# Altium PCB CAR_Amplifier.PcbDoc
Units mil, origin at the board's own origin, x right, y up, seen from the top; angles counter-clockwise.
Board outline 3145 x 2850 mil, 2 copper layers (Top Layer, Bottom Layer); 23 components, 24 nets, 69 pads, 3 vias.
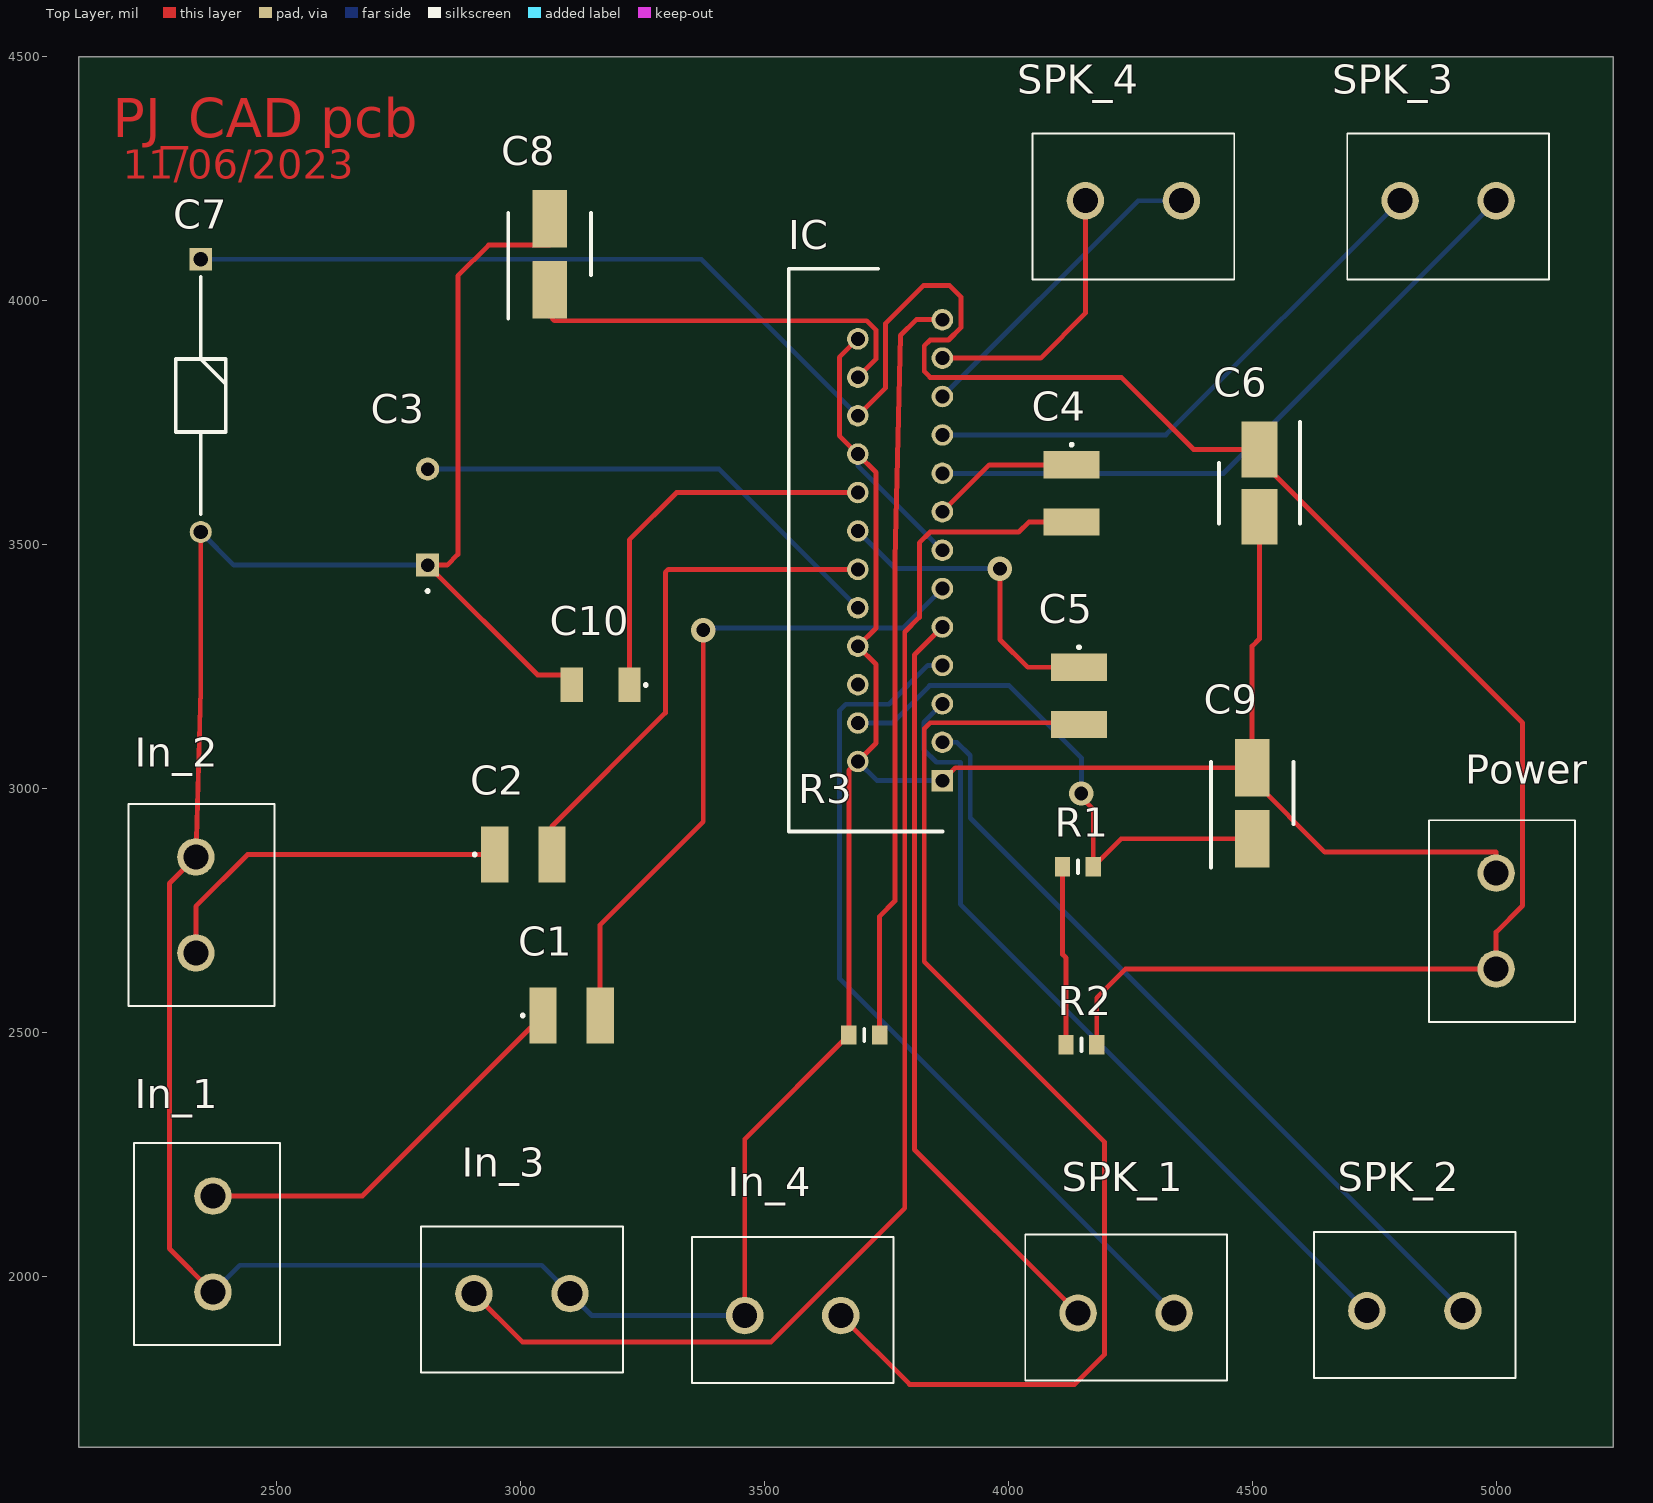
[diagram p0: Top Layer view]
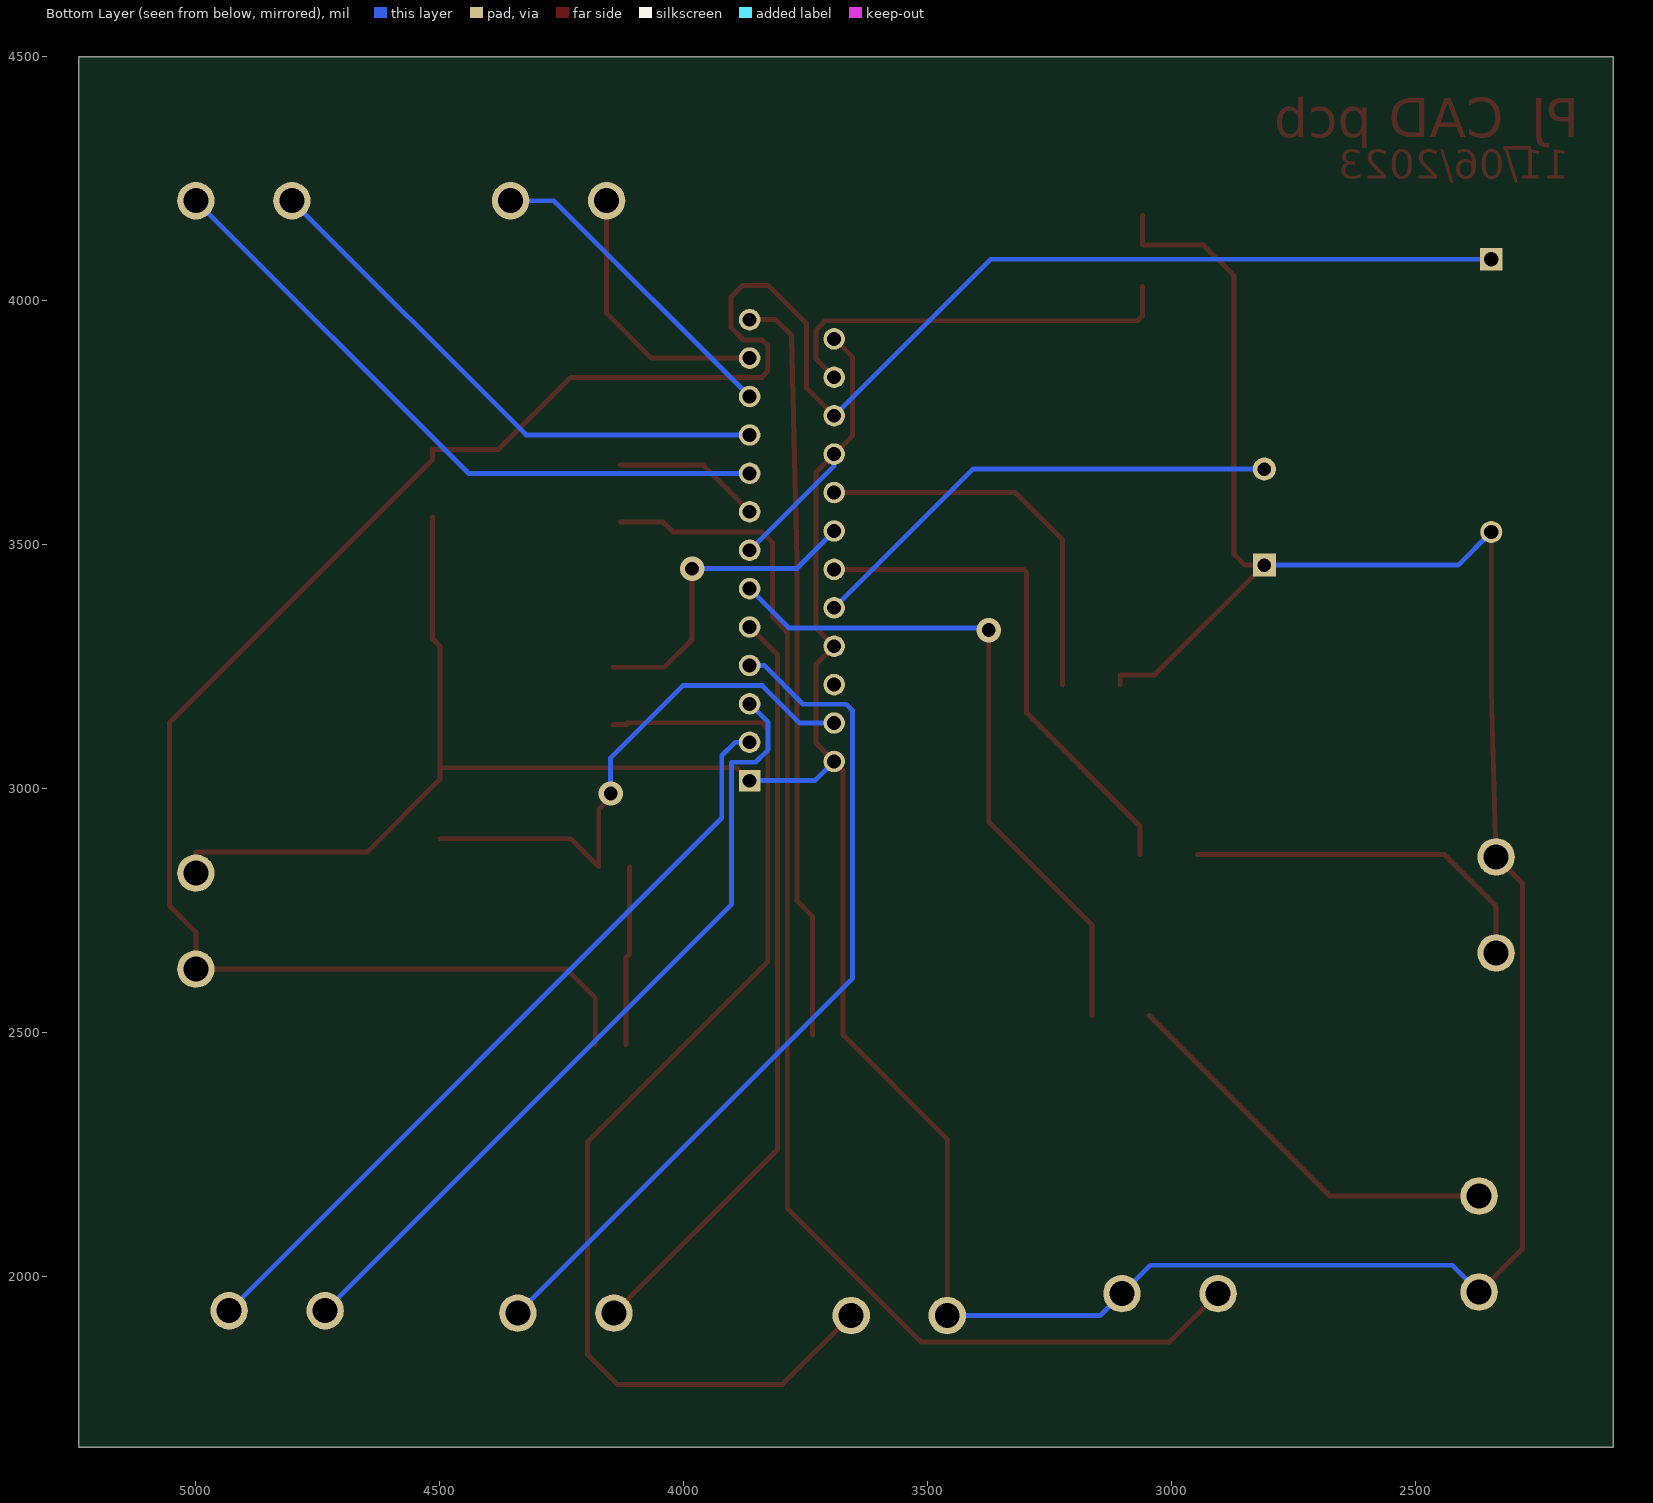
[diagram p1: Bottom Layer view, seen from below]
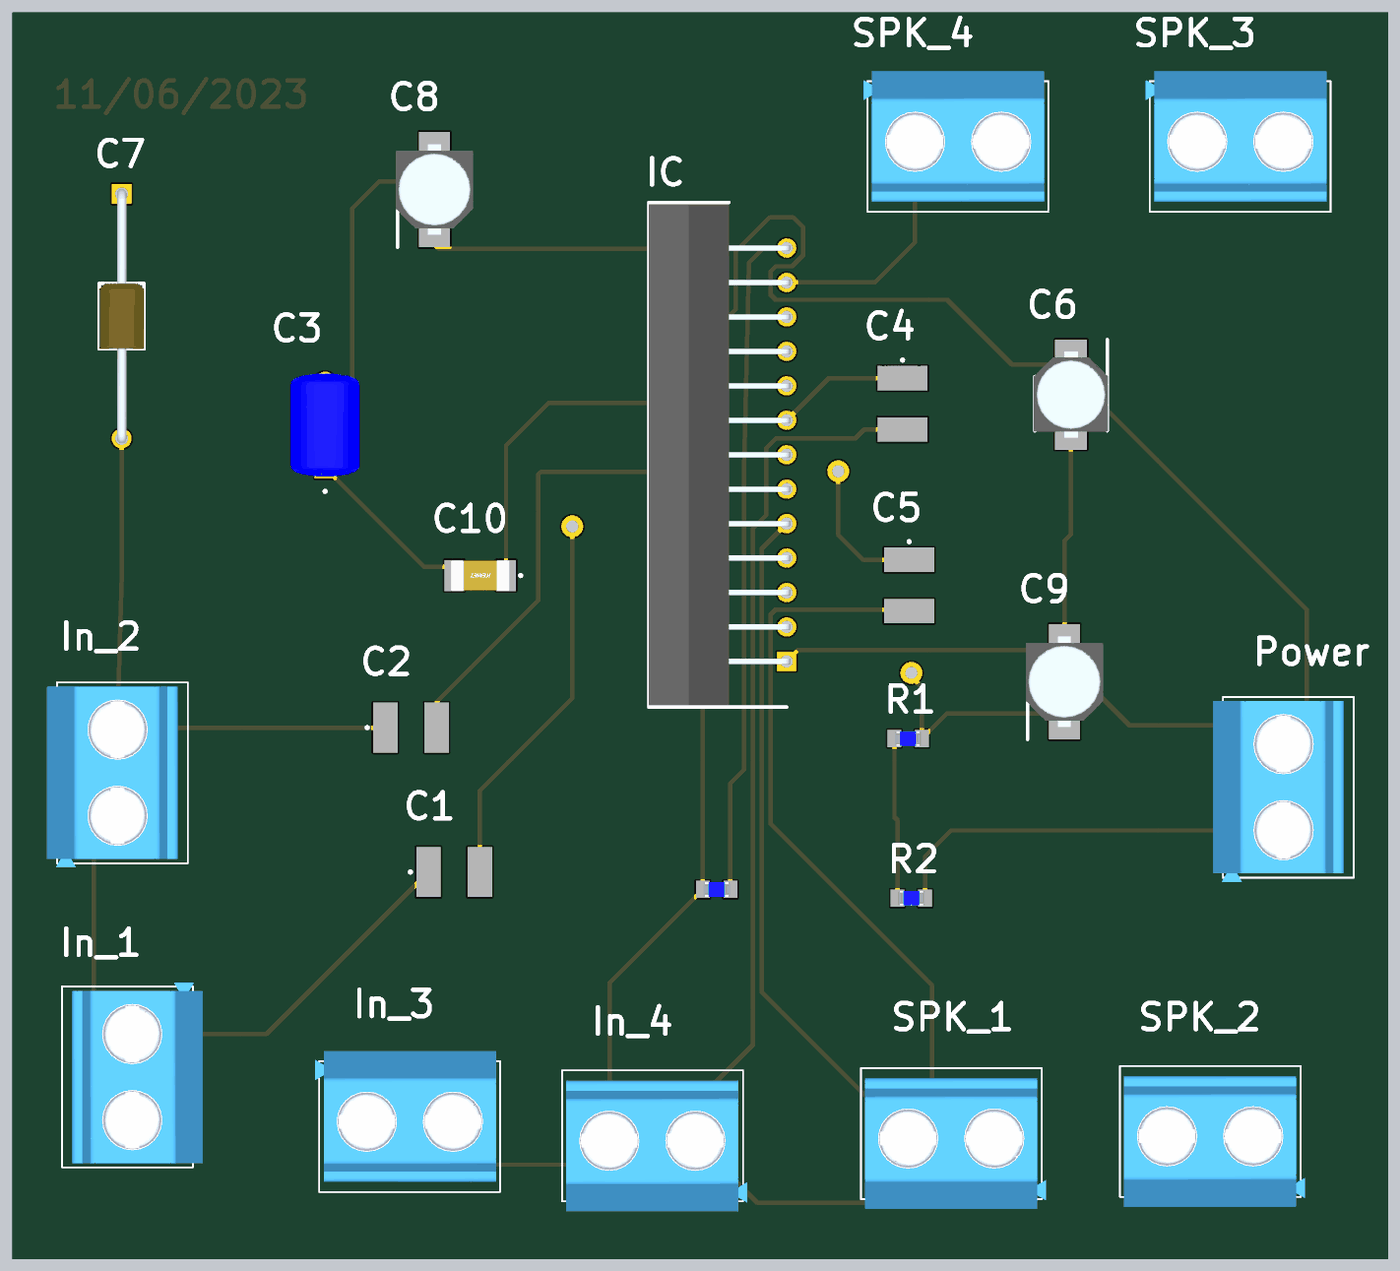
[diagram p2: 3D render of the assembled board from above, using the file's embedded part models]

## Layer stack, top to bottom
Top Solder: solder mask 0.4, Solder Resist, Dk 3.5
Top Layer: signal copper 1.4
Dielectric 1: dielectric 12.6, FR-4, Dk 4.8
Bottom Layer: signal copper 1.4
Bottom Solder: solder mask 0.4, Solder Resist, Dk 3.5

## Board outline
2095,1650 5240,1650 5240,4500 2095,4500

## Design rules (kind name [scope] priority, off if disabled: settings)
Clearance [All] p1: gap=10 ignorepadtopadclearanceinfootprint=FALSE except(0: Arc-Hole Track-Hole SMDPad-Hole THPad-Hole Via-Hole Fill-Hole Poly-Hole Region-Hole Text-Hole)
PolygonConnect [All] p1: connectstyle=Relief reliefconductorwidth=10 reliefentries=4 polygonreliefangle="90 Angle" airgapwidth=10
RoomDefinition CAR_Amplifier [InComponentClass('CAR_Amplifier')] p1: confinementstyle=ConfineIn formatcopy=TRUE lockcomponents=FALSE outline 6855,1150 7690,1150 7690,2445 6855,2445
RoutingVias [All] p1: holewidth=28 width=50 viastyle="Through Hole" minholewidth=28 minwidth=50 maxholewidth=28 maxwidth=50
SolderMaskExpansion [All] p1: expansion=4 istentingtop=FALSE
Width [All] p1: maxlimit=10 minlimit=10 preferedwidth=10
30 further rules are at their usual default settings.

## Components (designator, comment, footprint, x,y, rotation, side; value= is the part's Value field where it differs from the comment)
C1 "220nF" C1210_FT 3105,2535 r0 top
C2 "220nF" C1210_FT 3006.34,2865 r0 top
C3 "47uF" FK20 2810,3458.15 r90 top
C4 "220nF" C1210_FT 4130,3605 r270 top
C5 "220nF" C1210_FT 4145,3190 r270 top
C6 "2.2uF" CAPAE420X610N 4515,3626.1 r270 top
C7 "100nF" CAPPA1420W55L380D260 2345,4085 r270 top locked
C8 "1uF" CAPAE430X550N 3060,4095 r90 top
C9 "1uF" CAPAE430X550N 4500,2970 r90 top
C10 "470nF" C1206 3164.5,3212.5 r180 top
IC "TDA7850" TO100P465X2910X1977-25P 3865,3016.3 r90 top
In_1 "TB002-500-02BE" TB00250002BE 2370,1968.15 r90 top
In_2 "TB002-500-02BE" TB00250002BE 2335,2860 r270 top
In_3 "TB002-500-02BE" TB00250002BE 3101.85,1965 r180 top
In_4 "TB002-500-02BE" TB00250002BE 3460,1920 r0 top
Power "TB002-500-02BE" TB00250002BE 5000,2826.85 r270 top
R1 "10k" RESC1608X55N 4142.83,2840 r180 top
R2 "47k" RESC1608X55N 4150,2475 r0 top
R3 "10k" RESC1608X55N 3705,2495 r0 top
SPK_1 "TB002-500-02BE" TB00250002BE 4143.15,1925 r0 top
SPK_2 "TB002-500-02BE" TB00250002BE 4735,1930 r0 top
SPK_3 "TB002-500-02BE" TB00250002BE 5000,4205 r180 top
SPK_4 "TB002-500-02BE" TB00250002BE 4355,4205 r180 top

## Footprints (in the part's own frame and the unit in brackets; to place one, negate y for a bottom-side part, rotate by r counter-clockwise, add the part's x,y. Pads: shape width x height; smd on the part's side, far side on the other; paste and mask are expansions set on the pad)
C1206 [mm]
  rect 1.15x1.8 smd: 1(-1.5,0) 2(1.5,0)
  silkscreen extent -2.4,-0.05 -2.3,0.05, body extent -1.7,-0.9 1.7,0.9, height 1.75
C1210_FT [mm]
  rect 1.42x2.91 smd: 1(-1.49,0) 2(1.49,0)
  silkscreen extent -2.59,-0.05 -2.49,0.05, body extent -1.85,-1.45 -1.85,-1.45
CAPAE420X610N [mm]
  rect 2.9x1.85 smd: 1(-1.75,0) 2(1.75,0)
  silkscreen extent -3.2,-2.1 2.1,2.1, body extent -2.5,-2.15 2.5,2.15, height 6.1
CAPAE430X550N [mm]
  rect 3x1.8 smd: 1(-1.85,0) 2(1.85,0)
  silkscreen extent -3.35,-2.15 2.15,2.15, body extent -2.63,-2.25 2.63,2.25, height 5.5
CAPPA1420W55L380D260 [mm]
  rect 1.15x1.15 hole 0.75: 1(0,0)
  round 1.15 hole 0.75: 2(14.2,0)
  silkscreen extent 0.93,-1.3 13.28,1.3, body extent -0.28,-1.29 14.48,1.29, height 2.6
FK20 [mm]
  rect 1.2x1.2 hole 0.7: 1(0,0)
  round 1.2 hole 0.7: 2(5,0)
  silkscreen extent -1.4,-0.05 -1.3,0.05, body extent -0.5,-2 5.5,2, height 7.41
RESC1608X55N [mm]
  rect 0.8x1 smd: 1(-0.8,0) 2(0.8,0)
  silkscreen extent 0,-0.33 0,0.33, body extent -0.77,-0.42 0.78,0.43, height 0.45
TB00250002BE [mm]
  round 1.95 hole 1.3: 1(0,0) 2(5,0)
  silkscreen extent -2.75,-3.5 7.75,4.1, body extent -2.51,-4.08 7.99,3.52, height 9.99
TO100P465X2910X1977-25P [mm]
  rect 1.12x1.12 hole 0.72: 1(0,0)
  round 1.12 hole 0.72: 2(1,4.4) 3(2,0) 4(3,4.4) 5(4,0) 6(5,4.4) 7(6,0) 8(7,4.4) 9(8,0) 10(9,4.4) 11(10,0) 12(11,4.4) 13(12,0) 14(13,4.4) 15(14,0) 16(15,4.4) 17(16,0) 18(17,4.4) 19(18,0) 20(19,4.4) 21(20,0) 22(21,4.4) 23(22,0) 24(23,4.4) 25(24,0)
  silkscreen extent -2.65,0 26.65,8, body extent -2.55,-0.2 26.55,8, height 18.97

## Part data
C1 C2 C4 C5: library part C1210X224KARACAUTO, "Capacitor", Manufacturer_Name=KEMET, Mouser Part Number=80-C1210X224KARAUTO, Datasheet Link=https://content.kemet.com/datasheets/KEM_C1078_X7R_FT-CAP_AUTO_SMD.pdf, Manufacturer_Part_Number=C1210X224KARACAUTO, Mouser Price/Stock=https://www.mouser.co.uk/ProductDetail/KEMET/C1210X224KARACAUTO?qs=wnTfsH77Xs4S7Vc0Z3FaCA%3D%3D
C3: library part FK20X5R0J476MN000, "Capacitor", Manufacturer_Name=TDK, Datasheet Link=https://product.tdk.com/system/files/dam/doc/product/capacitor/ceramic/lead-mlcc/catalog/leadmlcc_conventional_fk_en.pdf, Height=7mm, Manufacturer_Part_Number=FK20X5R0J476MN000
C6: library part UWD1H2R2MCL1GS, "Capacitor Polarised", Manufacturer_Name=Nichicon, Datasheet Link=https://datasheet.datasheetarchive.com/originals/dk/DKDS-9/176768.pdf, Height=6.1mm, Manufacturer_Part_Number=UWD1H2R2MCL1GS
C7: library part A104K15X7RF5UAAP, "Capacitor", Manufacturer_Name=Vishay, Mouser Part Number=594-A104K15X7RF5UAAP, Datasheet Link=https://www.vishay.com/docs/45249/apseries.pdf, Manufacturer_Part_Number=A104K15X7RF5UAAP, Mouser Price/Stock=https://www.mouser.co.uk/ProductDetail/Vishay-BC-Components/A104K15X7RF5UAAP?qs=DPoM0jnrROUJ7499VET5BQ%3D%3D
C8 C9: library part 865080640001, "Capacitor Polarised", Manufacturer_Name="Wurth Elektronik", Mouser Part Number=710-865080640001, Datasheet Link=https://www.we-online.com/catalog/datasheet/865080640001.pdf, Height=5.5mm, Manufacturer_Part_Number=865080640001, Mouser Price/Stock=https://www.mouser.co.uk/ProductDetail/Wurth-Elektronik/865080640001?qs=0KOYDY2FL28T3O9R7owGdg%3D%3D
C10: library part C1206C474K1REC7210, "Capacitor", Manufacturer_Name=KEMET, Mouser Part Number=80-C1206C474K1RECLR, Datasheet Link=https://content.kemet.com/datasheets/KEM_C1090_X7R_ESD.pdf, Manufacturer_Part_Number=C1206C474K1REC7210, Mouser Price/Stock=https://www.mouser.co.uk/ProductDetail/KEMET/C1206C474K1REC7210?qs=55YtniHzbhCc12xecGnQhw%3D%3D
IC: "Integrated Circuit", Manufacturer_Name=STMicroelectronics, Mouser Part Number=511-TDA7850, Arrow Part Number=TDA7850, Arrow Price/Stock=https://www.arrow.com/en/products/tda7850/stmicroelectronics?region=nac, Datasheet Link=http://www.st.com/web/en/resource/technical/document/datasheet/CD00145702.pdf, Height=4.65mm, Manufacturer_Part_Number=TDA7850, Mouser Price/Stock=https://www.mouser.co.uk/ProductDetail/STMicroelectronics/TDA7850?qs=VJaATVMq%252BXpapg7tNDopRA%3D%3D
In_1 In_2 In_3 In_4 Power SPK_1 SPK_2 SPK_3 SPK_4: "Connector", Manufacturer_Name="CUI Devices", Mouser Part Number=490-TB002-500-02BE, Arrow Part Number=TB002-500-02BE, Arrow Price/Stock=https://www.arrow.com/en/products/tb002-500-02be/cui-devices?region=nac, Datasheet Link=https://eu.mouser.com/datasheet/2/670/tb002_500-1550579.pdf, Height=10.4mm, Manufacturer_Part_Number=TB002-500-02BE, Mouser Price/Stock=https://www.mouser.co.uk/ProductDetail/CUI-Devices/TB002-500-02BE?qs=vLWxofP3U2x9716kcgva%2Fw%3D%3D
R1 R3: library part MCT06030D1002DP500, "Resistor", Manufacturer_Name=Vishay, Mouser Part Number=594-MCT06030D1002DP5, Arrow Part Number=MCT06030D1002DP500, Arrow Price/Stock=https://www.arrow.com/en/products/mct06030d1002dp500/vishay?region=nac, Datasheet Link=http://www.vishay.com/docs/28705/mcx0x0xpro.pdf, Height=0.55mm, Manufacturer_Part_Number=MCT06030D1002DP500, Mouser Price/Stock=https://www.mouser.co.uk/ProductDetail/Vishay-Beyschlag/MCT06030D1002DP500?qs=2UBm2ZpWbY4LmLEyOhD%252Bvw%3D%3D
R2: library part MCT06030C4702FP500, "Resistor", Manufacturer_Name=Vishay, Mouser Part Number=594-MCT06030C4702FP5, Datasheet Link=http://www.vishay.com/docs/28705/mcx0x0xpro.pdf, Height=0.55mm, Manufacturer_Part_Number=MCT06030C4702FP500, Mouser Price/Stock=https://www.mouser.co.uk/ProductDetail/Vishay-Beyschlag/MCT06030C4702FP500?qs=7ZE6F4QMOBa8uKZSFemjDw%3D%3D

## Via types
v1: diameter 50, hole 28, Top Layer to Bottom Layer, 3 vias

## Nets (pads, with @x,y where several pads share a name; then routed paths per layer and width w, separated by ;. In a path a pad name is that pad's centre, name@x,y a point inside that pad or via, vN(x,y) a via of type N, cw(c..) or ccw(c..) an arc to the next point about the centre after c; other vN are vias at no path point)
GND: C3.1 C6.2 C7.2 C8.2 C9.2 C10.2 IC.1 IC.2 IC.8 IC.13 IC.18 IC.24 In_1.1 In_2.1 In_3.1 In_4.1 Power.1 R3.1 | length 9036.2
  Top Layer w10: C7.2 2345,3203 In_2.1 2281,2806 2281,2057.15 In_1.1 ; C8.2@3060,4175 3060,4114 2935,4114 2872,4051 2872,3480 2850.15,3458.15 C3.1 3035.15,3233 3105.44,3233 C10.2 ; In_4.1 3460,2281.5 R3.1 3673.5,3037.4 IC.2 3729,3092.9 3729,3254.66 IC.8 3729,3329.12 3729,3648.36 IC.18 3654,3723.36 3654,3884.04 IC.24 ; IC.1 3891.54,3042.83 C9.2 ; C6.2 4515,3307 4500,3292 C9.2 ; Power.1 5000,2870 4649,2870 4500,3019 C9.2
  Bottom Layer w10: C7.2 2412.79,3458.15 C3.1 ; In_1.1 2424.85,2023 3043.85,2023 In_3.1 3146.85,1920 In_4.1 ; IC.2 3731.14,3016.3 IC.1 ; IC.18 3691.77,3661.97 IC.13
NetC1_1: C1.1 In_1.2 | length 829.6
  Top Layer w10: In_1.2 2676.34,2165 C1.1
NetC1_2: C1.2 IC.11 | length 1402.7
  Top Layer w10: C1.2 3163.66,2720.66 3375,2932 v1(3375,3325)
  Bottom Layer w10: v1(3375,3325) 3378.94,3328.94 3783.94,3328.94 IC.11
NetC2_1: C2.1 In_2.2 | length 752.4
  Top Layer w10: In_2.2 2335,2759 2441,2865 C2.1
NetC2_2: C2.2 IC.12 | length 1071.6
  Top Layer w10: C2.2 3065,2923 3297.37,3155.37 3297.37,3443.51 3303.23,3449.37 IC.12
NetC3_2: C3.2 IC.10 | length 999.6
  Bottom Layer w10: C3.2 3407.4,3655 IC.10
NetC4_1: C4.1 IC.15 | length 304.8
  Top Layer w10: IC.15 3961.18,3663.66 C4.1
NetC4_2: C4.2 In_3.2 | length 2743.5
  Top Layer w10: In_3.2 3004,1866 3514,1866 3787.95,2139.95 3787.95,3320.95 3818,3351 3818,3504 3840,3526 4021.66,3526 4042,3546.34 C4.2
NetC5_1: C5.1 IC.14 | length 654.1
  Top Layer w10: v1(3983,3451) 3983,3305.66 4040,3248.66 C5.1
  Bottom Layer w10: IC.14 3768.88,3451 v1(3983,3451)
NetC5_2: C5.2 In_4.2 | length 2385.3
  Top Layer w10: In_4.2 3797.85,1779 4136,1779 4197,1840 4197,2276 3827.95,2645.05 3827.95,3122.95 3840,3135 4116,3135 4116,3131.34 C5.2
NetC6_1: C6.1 C7.1 IC.20 Power.2 R2.2 | length 5097.5
  Top Layer w10: IC.20 3748.82,3821.38 3748.82,3953.65 3826.17,4031 3880,4031 3903,4008 3903,3945 3877.49,3919.49 3840,3919.49 3827.95,3907.44 3827.95,3855.05 3840,3843 4232,3843 4380,3695 C6.1 4515,3674 5054,3135 5054,2760 5000,2706 Power.2 4240,2630 4181.5,2571.5 R2.2
  Bottom Layer w10: C7.1 3371.1,4085 IC.20
NetC8_1: C8.1 IC.22 | length 853.5
  Top Layer w10: C8.1@3060,4029.33 3060,3969 3070,3959 3710,3959 3728.82,3940.18 3728.82,3880.12 IC.22
NetC9_1: C9.1 IC.4 R1.1 | length 1133.7
  Top Layer w10: v1(4150,2990) 4150,2982.09 4174.33,2957.76 R1.1 4231.5,2897.17 C9.1
  Bottom Layer w10: IC.4 3762.36,3134.41 3838.95,3211 4002,3211 4150,3063 v1(4150,2990)
NetC10_1: C10.1 IC.16 | length 805.8
  Top Layer w10: C10.1 3223.56,3510 3320.41,3606.85 IC.16
NetIC_3: IC.3 SPK_2.2 | length 1624.4
  Bottom Layer w10: IC.3 3894.83,3095.04 3922.05,3067.83 3922.05,2939.8 SPK_2.2
NetIC_5: IC.5 SPK_2.1 | length 1664.4
  Bottom Layer w10: IC.5 3827,3135.78 3827,3080 3853,3054 3902.05,3054 3902.05,2762.95 SPK_2.1
NetIC_7: IC.7 SPK_1.2 | length 1768.5
  Bottom Layer w10: IC.7 3835.17,3252.52 3755.65,3173 3667,3173 3654,3160 3654,2611 SPK_1.2
NetIC_9: IC.9 SPK_1.1 | length 1568.7
  Top Layer w10: IC.9 3807.95,3274.21 3807.95,2260.2 SPK_1.1
NetIC_17: IC.17 SPK_3.1 | length 1366.5
  Bottom Layer w10: IC.17 4441.22,3646.22 SPK_3.1
NetIC_19: IC.19 SPK_3.2 | length 1137
  Bottom Layer w10: IC.19 4323.11,3724.96 SPK_3.2
NetIC_21: IC.21 SPK_4.1 | length 656.2
  Bottom Layer w10: IC.21 4266.3,4205 SPK_4.1
NetIC_23: IC.23 SPK_4.2 | length 561.9
  Top Layer w10: IC.23 4066.37,3882.44 4158.15,3974.22 SPK_4.2
NetIC_25: IC.25 R3.2 | length 1546.4
  Top Layer w10: R3.2 3736.5,2738.5 3767.95,2769.95 3767.95,3468.99 3779,3928.78 3811.4,3961.18 IC.25
NetR1_2: R1.2 R2.1 | length 368
  Top Layer w10: R1.2 4111.34,2660.17 4118.5,2653 R2.1
pads on no net: IC.6

## Other copper
Top Layer:
  text "PJ_CAD pcb" at 2165,4335 h80
  text "11/06/2023" at 2185,4250 h60